# Altium PCB BLDC_Motor_Reversal_Rev1.PcbDoc
Units mil, origin at the board's own origin, x right, y up, seen from the top; angles counter-clockwise.
Board outline 3340 x 3040 mil, 2 copper layers (Top Layer, Bottom Layer); 10 components, 8 nets, 28 pads, 1 vias.
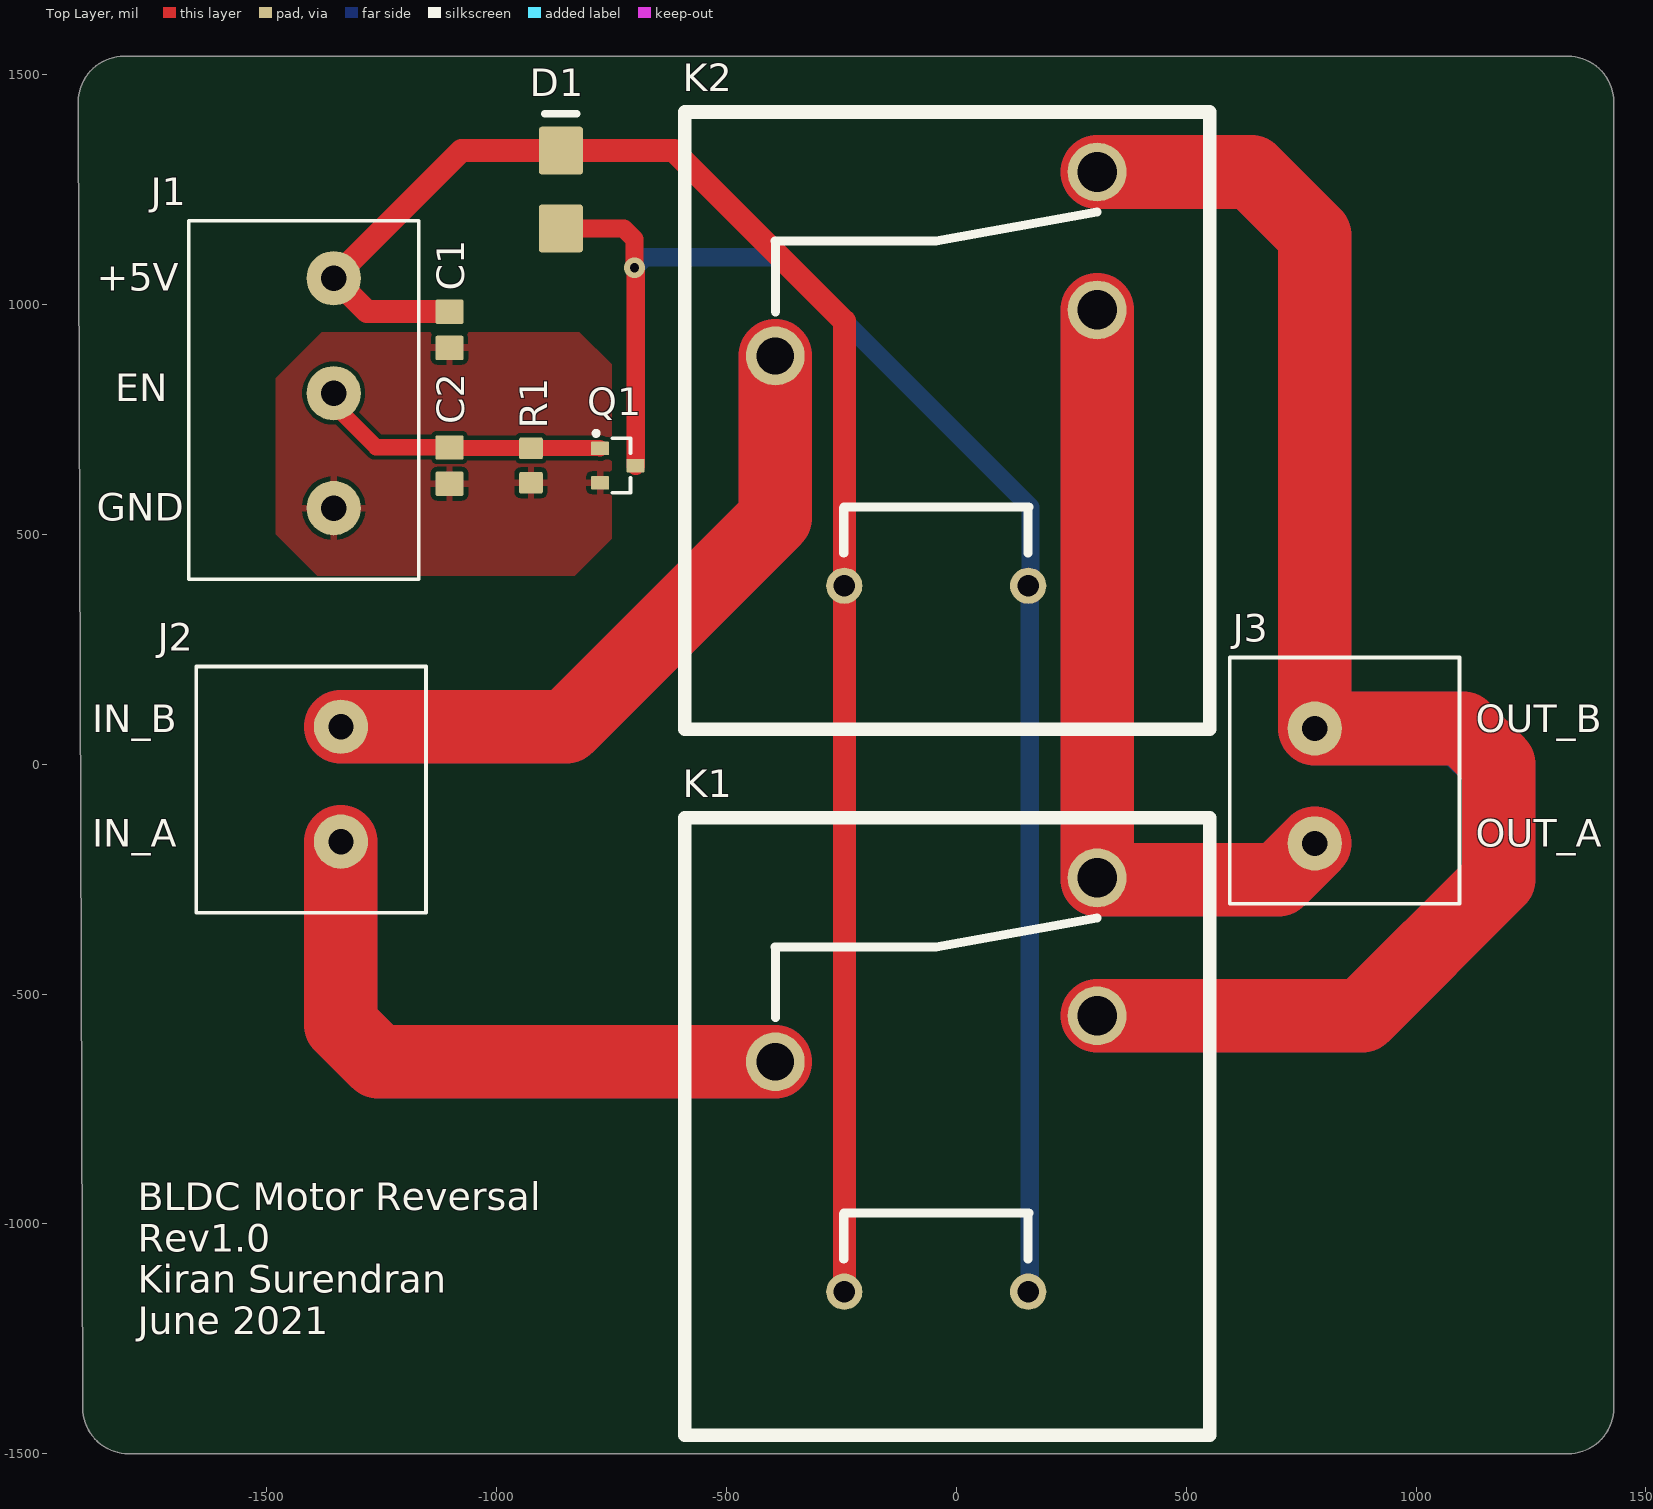
[diagram p0: Top Layer view]
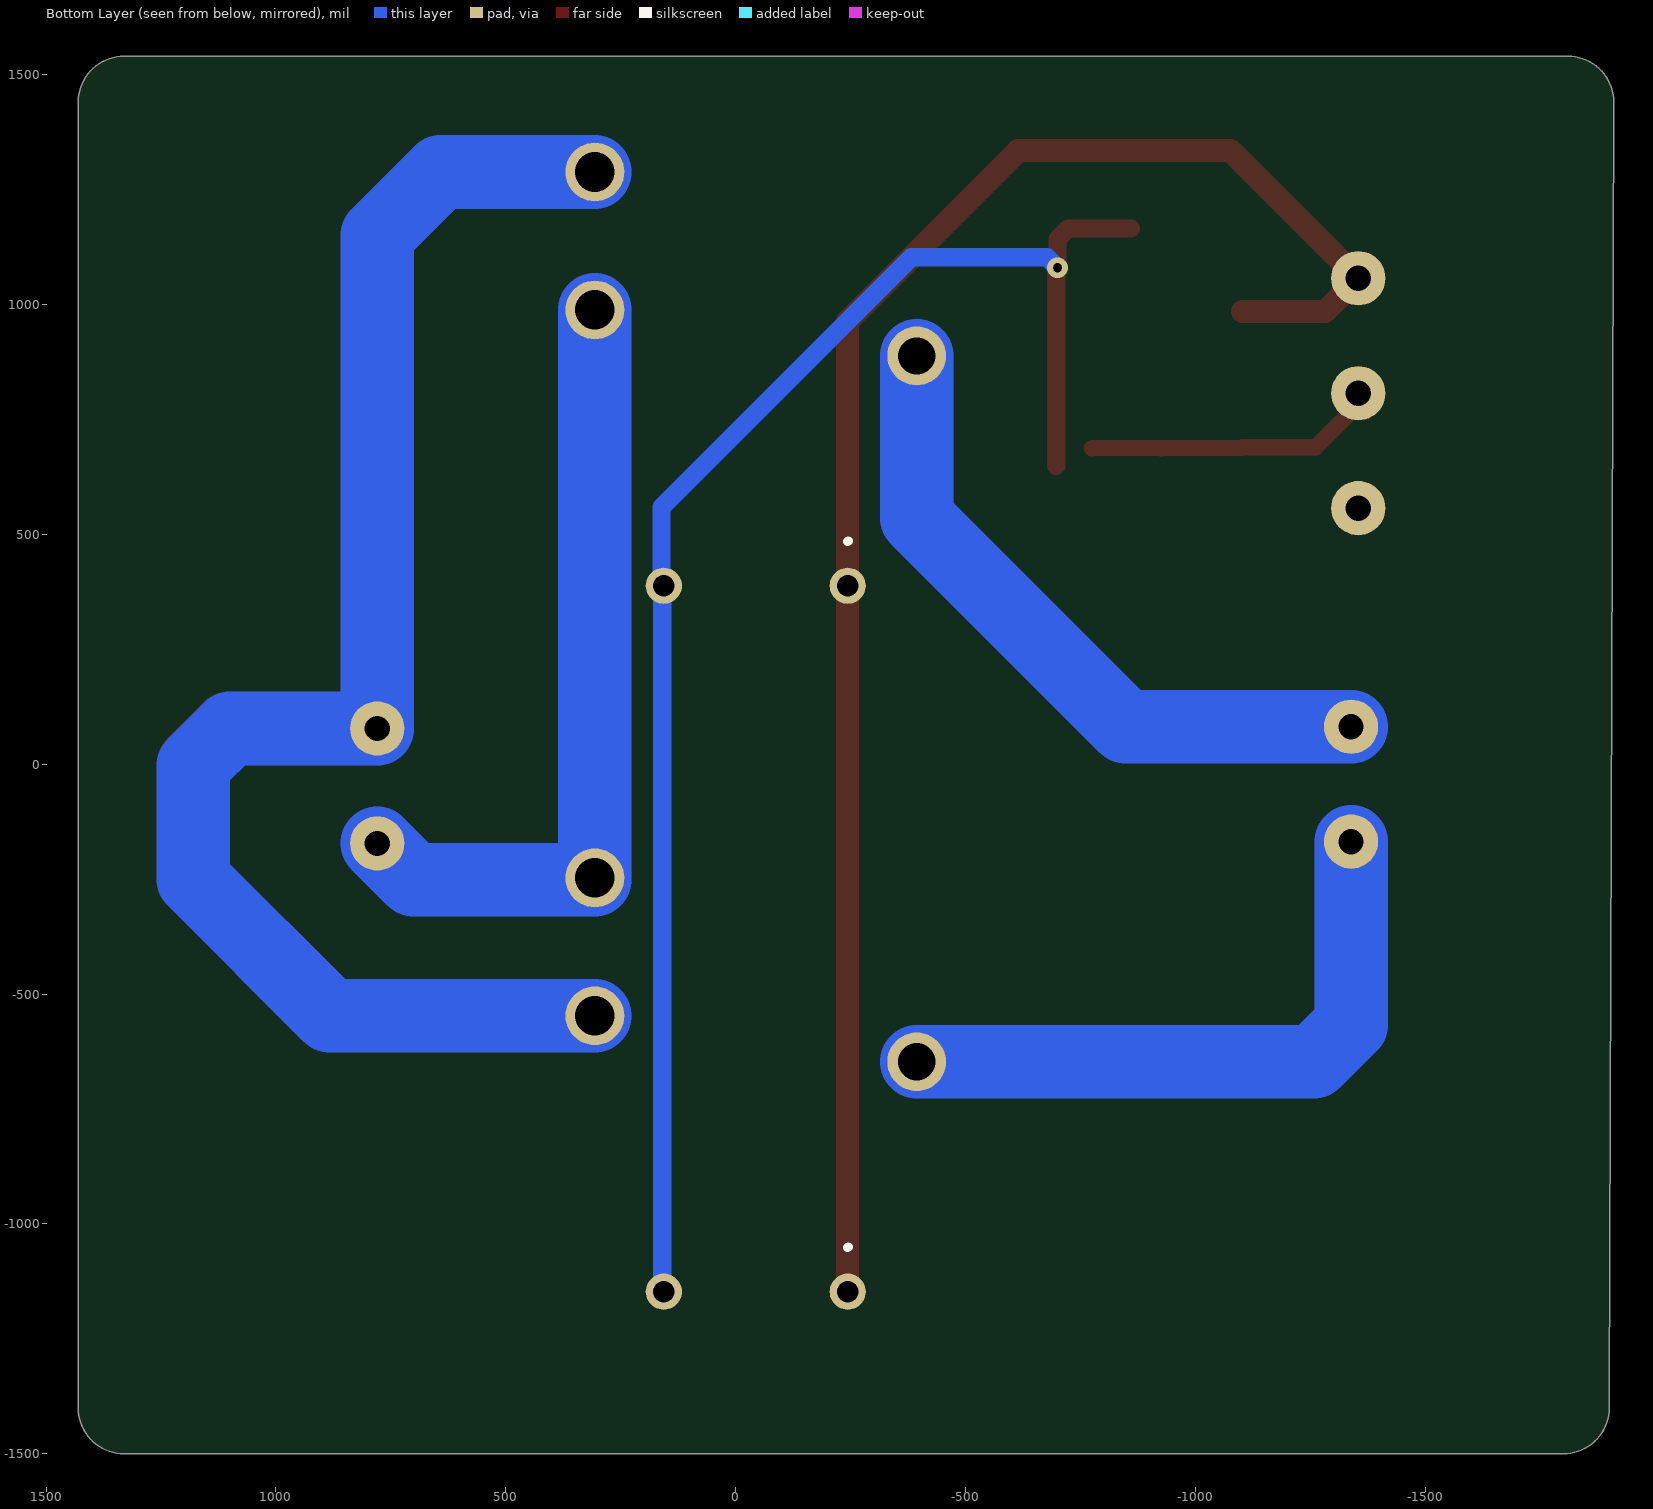
[diagram p1: Bottom Layer view, seen from below]
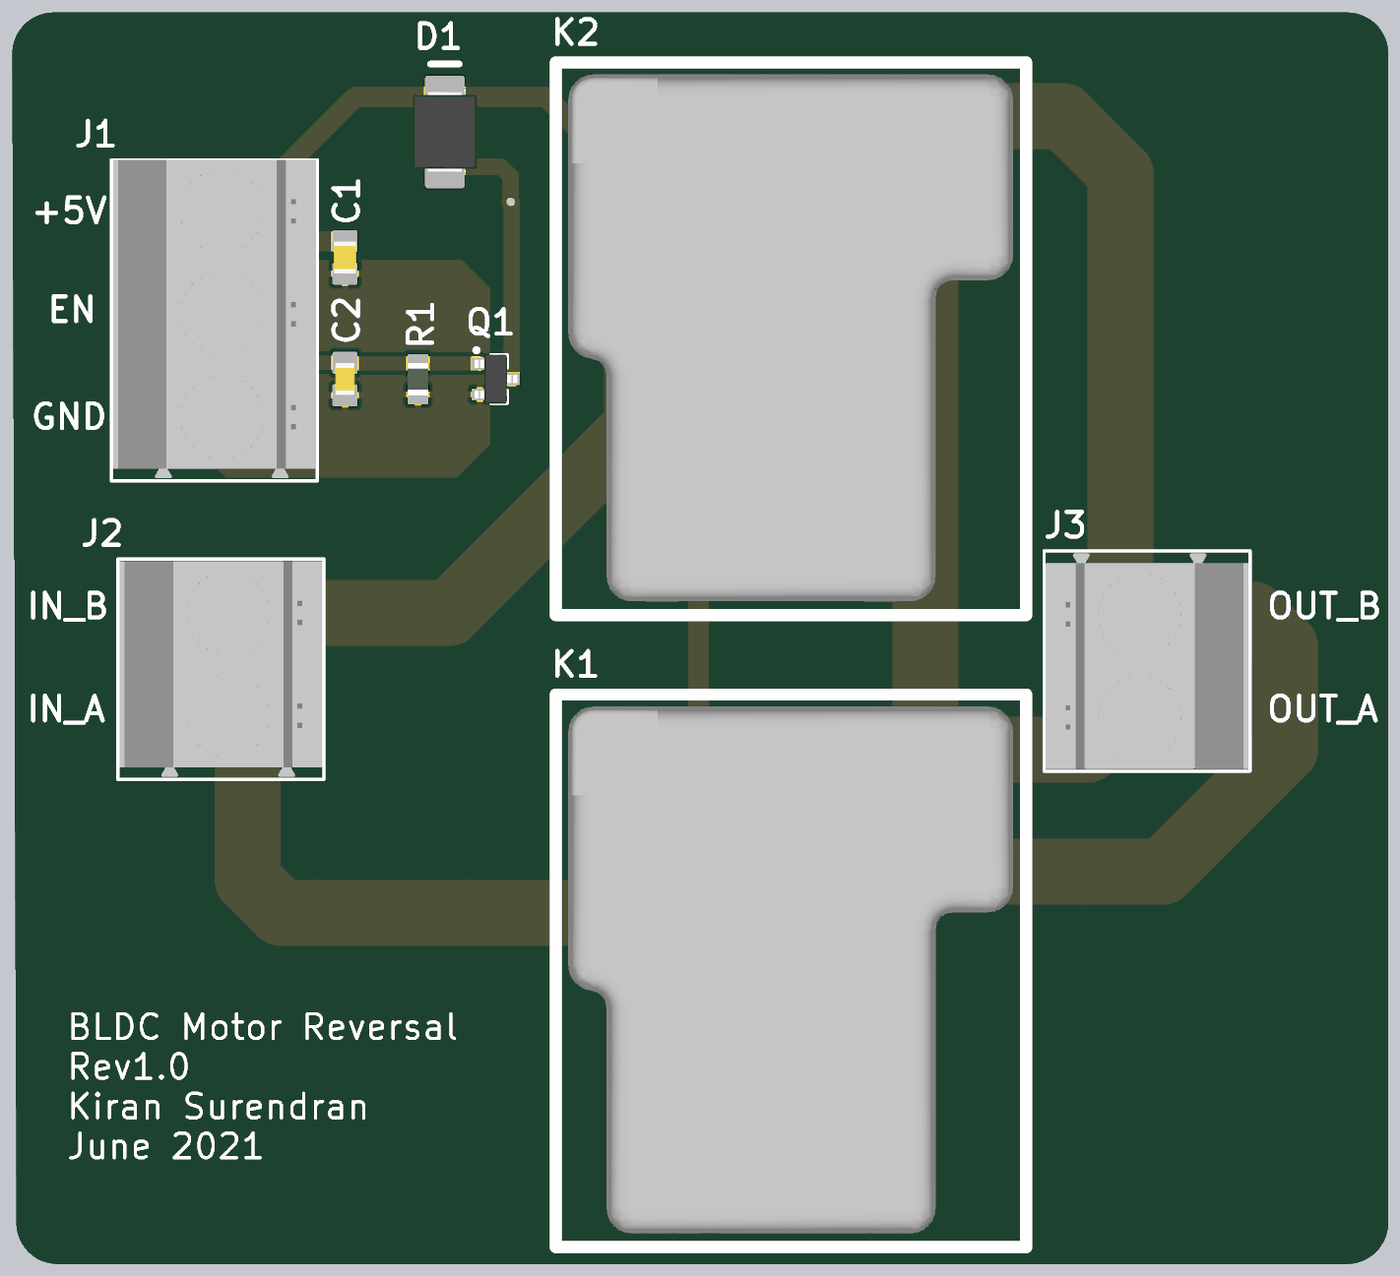
[diagram p2: 3D render of the assembled board from above, using the file's embedded part models]

## Layer stack, top to bottom
Top Solder: solder mask 0.4, Solder Resist, Dk 3.5
Top Layer: signal copper 1.4
Dielectric 1: dielectric 12.6, FR-4, Dk 4.8
Bottom Layer: signal copper 1.4
Bottom Solder: solder mask 0.4, Solder Resist, Dk 3.5

## Board outline
-1910,1420 -1910,1440 cw(c-1810,1440) -1810,1540 1330,1540 cw(c1330,1440) 1430,1440 1430,-1400 cw(c1330,-1400) 1330,-1500 -1800,-1500 cw(c-1800,-1400) -1900,-1400 -1900,-1380

## Design rules (kind name [scope] priority, off if disabled: settings)
BoardOutlineClearance [All] p1: gap=7.87 ignorepadtopadclearanceinfootprint=FALSE
Clearance "Polygon To Others" [InPolygon] p1: gap=10 ignorepadtopadclearanceinfootprint=FALSE
Clearance [All] p2: gap=5 ignorepadtopadclearanceinfootprint=FALSE except(9.84: Arc-Hole Track-Hole SMDPad-Hole THPad-Hole Via-Hole Fill-Hole Poly-Hole Region-Hole Text-Hole)
ComponentClearance [All] p1: gap=5 collisioncheckmode=3 verticalgap=5 showdistances=TRUE
DiffPairsRouting [All] p1: maxlimit=10 minlimit=5 mostfreqgap=5 toplayer_minwidth=5 toplayer_maxwidth=1000 toplayer_prefwidth=5 bottomlayer_minwidth=5 bottomlayer_maxwidth=1000 bottomlayer_prefwidth=5 maxuncoupledlength=500
Height [All] p1: minheight=0 maxheight=71497.94 prefheight=500
HoleSize [All] p1: absolutevalues=TRUE maxlimit=248.03 minlimit=11.81 maxpercent=80.000 minpercent=20.000
HoleToHoleClearance [All] p1: gap=9.84 allowstackedmicrovias=FALSE
MinimumAnnularRing [All] p1: minimumring=3
MinimumSolderMaskSliver [All] p1: minsoldermaskwidth=0
PlaneClearance [All] p1: clearance=8
PlaneConnect PlaneConnectPowerPads [InPadClass('PowerPads')] p1: planeconnectstyle=Direct reliefexpansion=20 reliefentries=4 reliefconductorwidth=10 reliefairgap=10
PlaneConnect [All] p2: pad.planeconnectstyle=Relief pad.reliefexpansion=11.81 pad.reliefentries=4 pad.reliefconductorwidth=8 pad.reliefairgap=8 via.planeconnectstyle=Direct via.reliefexpansion=11.81 via.reliefentries=4 via.reliefconductorwidth=5 via.reliefairgap=5
PolygonConnect PolygonConnectPowerPads [All vs (InPadClass('PowerPads'))] p1: connectstyle=Direct reliefconductorwidth=10 reliefentries=4 polygonreliefangle="90 Angle" airgapwidth=10
PolygonConnect [All] p2: thpad.connectstyle=Relief thpad.reliefconductorwidth=15 thpad.reliefentries=4 thpad.polygonreliefangle="90 Angle" thpad.airgapwidth=10 smdpad.connectstyle=Relief smdpad.reliefconductorwidth=15 smdpad.reliefentries=4 smdpad.polygonreliefangle="90 Angle" smdpad.airgapwidth=10 via.connectstyle=Direct via.reliefconductorwidth=5 via.reliefentries=4 via.polygonreliefangle="90 Angle" via.airgapwidth=5
RoutingVias [All] p1: holewidth=11.81 width=23.62 viastyle="Through Hole" minholewidth=11.81 minwidth=23.62 maxholewidth=23.62 maxwidth=259.84
SilkToSilkClearance [All] p1: silktosilkclearance=0
SilkToSolderMaskClearance [IsPad] p1: minsilkscreentomaskgap=5 clearancetoexposedcopper=TRUE
SolderMaskExpansion [All] p1: expansion=2.95 istentingtop=FALSE
Width [All] p1: maxlimit=1000 minlimit=5 preferedwidth=5 minimp=50.000000 maximp=50.000000 favimp=50.000000
20 further rules are at their usual default settings.

## Components (designator, comment, footprint, x,y, rotation, side; value= is the part's Value field where it differs from the comment)
C1 "C0805C106K4PACTU" C0805C106K4PACTU -1102.36,944.88 r90 top
C2 "C0805C104K5RACTU" C0805C104K5RACTU -1102.36,649.61 r90 top
D1 "S1GB-13-F" S1GB-13-F -860,1250 r90 top
J1 "796740-3" 796740-3 -1354.33,807.09 r90 top
J2 "796740-2" 796740-2 -1338.58,-43.31 r90 top
J3 "796740-2" 796740-2 779.53,-47.24 r270 top
K1 "T9AS5D12-5" T9AS5D12-5 -393.7,-551.18 r0 top
K2 "T9AS5D12-5" T9AS5D12-5 -393.7,984.25 r0 top
Q1 "SI2312BDS-T1-E3" SI2312BDS-T1-E3 -736.22,649.61 r0 top
R1 "RC0805JR-0710KL" RC0805JR-0710KL -925.2,649.61 r90 top

## Footprints (in the part's own frame and the unit in brackets; to place one, negate y for a bottom-side part, rotate by r counter-clockwise, add the part's x,y. Pads: shape width x height; smd on the part's side, far side on the other; paste and mask are expansions set on the pad)
796740-2 [mm]
  round 3 hole 1.4: 1(-3.175,0) 2(3.175,0)
  silkscreen extent -7.1,-4.7 6.5,8, body extent -6.95,-4.6 6.35,7.9, height 21.51
796740-3 [mm]
  round 3 hole 1.4 mask+0.102: 1(-6.35,0) 2(0,0) 3(6.35,0)
  silkscreen extent -10.28,-4.7 9.53,8, body extent -10.12,-4.6 9.53,7.9, height 21.51
C0805C104K5RACTU [mm]
  rrect15% 1.35x1.55 smd: 1(-1,0) 2(1,0)
  body extent -1,-0.6 1,0.6, height 0.89
C0805C106K4PACTU [mm]
  rrect15% 1.35x1.55 smd: 1(-1,0) 2(1,0)
  body extent -1,-0.7 1,0.7, height 1.21
RC0805JR-0710KL [mm]
  rrect15% 1.2x1.3 smd: 1(-0.95,0) 2(0.95,0)
  body extent -1,-0.62 1,0.62, height 0.61
S1GB-13-F [mm]
  rrect15% 2.65x2.45 smd: 1(2.15,0) 2(-2.15,0)
  silkscreen extent 4.19,-0.89 4.19,0.89, body extent -2.5,-1.97 2.5,1.97, height 2.5
SI2312BDS-T1-E3 [mm]
  rrect15% 1x0.75 smd: 1(-0.984,0.95) 2(-0.984,-0.95) 3(0.984,0)
  silkscreen extent -1.32,-1.5 0.7,1.9, body extent -1.32,-1.52 1.32,1.52, height 1.12
T9AS5D12-5 [mm]
  round 3.25 hole 2.19: 1(17.78,7.72) 2(17.78,0.1)
  round 3.25 hole 2.06: 3(0,-2.44)
  round 2 hole 1.17: 4(3.81,-15.14) 5(13.97,-15.14)
  silkscreen extent -5,-23.06 24,11.03, body extent -4.23,-22.22 23.2,10.3, height 20.05

## Part data
C1: "CERAMIC CAPACITOR, 10UF, 16V, X5R, 10%, 0805", Capacitance=10uF, Case/Package=0805, Manufacturer 1=KEMET, Supplier Part Number 1=399-8012-1-ND, Voltage Rating=16V, Manufacturer Part Number 1=C0805C106K4PACTU, Supplier 1=Digi-Key
C2: "Cap Ceramic 0.1uF 50V X7R 10% SMD 2.0 x 1.2 mm 125 C Paper T/R", Capacitance=100nF, Case/Package=0805, Manufacturer 1=KEMET, Supplier Part Number 1=399-1170-1-ND, Voltage Rating=50V, Manufacturer Part Number 1=C0805C104K5RACTU, Supplier 1=Digi-Key
D1: "Flyback Diode for SPDT", Manufacturer 1="Diodes Incorporated", Supplier Part Number 1=S1GB-FDICT-ND, IFSM=8.0A, Manufacturer Part Number 1=S1GB-13-F, Supplier 1=Digi-Key, VRRM=325V
J1: "TERM BLK 3P SIDE ENT 6.35MM PCB", Manufacturer 1="TE Connectivity AMP Connectors", Supplier Part Number 1=A98276-ND, Manufacturer Part Number 1=796740-3, Supplier 1=Digi-Key
J2 J3: "TERMINAL BLOCK, PLUG, 2POS, 24-10AWG", Current Rating=30A, Manufacturer="TE Connectivity", Supplier Part Number 1=A98275-ND, Voltage Rating=300V, Manufacturer Part Number=796740-2, Supplier 1=Digi-Key
K1 K2: "RELAY GEN PURPOSE SPDT 20A 5V", Coil Current=200mA, Coil Voltage (DC)=5V, Contact Current Rating=20A, Contact Voltage Rating (AC)=277V, Current Rating=30A, Manufacturer 1="TE Connectivity Potter & Brumfield Relays", Supplier Part Number 1=T9AS5D12-5-ND, Manufacturer Part Number 1=T9AS5D12-5, Supplier 1=Digi-Key, Voltage Rating (DC)=5V
Q1: "MOSFET", Manufacturer 1="Vishay Siliconix", Supplier Part Number 1=SI2312BDS-T1-E3CT-ND, Manufacturer Part Number 1=SI2312BDS-T1-E3, Supplier 1=Digi-Key
R1: "Res Thick Film 0805 10K Ohm 5% 1/8W ±100ppm/°C Molded SMD Paper T/R", Manufacturer 1=Yageo, Package=0805, Resistance=10kR, Supplier Part Number 1=311-10KARCT-ND, Tolerance=5%, Manufacturer Part Number 1=RC0805JR-0710KL, Supplier 1=Digi-Key

## Via types
v1: diameter 45, hole 20, Top Layer to Bottom Layer, tented both sides, 1 vias

## Nets (pads, with @x,y where several pads share a name; then routed paths per layer and width w, separated by ;. In a path a pad name is that pad's centre, name@x,y a point inside that pad or via, vN(x,y) a via of type N, cw(c..) or ccw(c..) an arc to the next point about the centre after c; other vN are vias at no path point)
5V: C1.2 D1.1 J1.3 K1.4 K2.4 | length 3772.3
  Top Layer w50: C1.2 -1281.5,984.25 J1.3 -1076.77,1334.65 -930,1334.65 -614.65,1334.65 -243.7,963.7 K2.4 K1.4
ENABLE_REVERSE: C2.2 J1.2 Q1.1 R1.2 | length 644.4
  Top Layer w35: J1.2 -1354.33,781.79 -1262.1,689.56 -1102.95,689.56 -1100.98,687.59 -925.78,687.59 R1.2 -924.61,687.59 -775.57,687.59 Q1.1
GND: C1.1 C2.1 J1.1 Q1.2 R1.1
IN_PHASE_A: J2.1 K1.3 | length 2753.1
  Top Layer w160: J2.1 -1338.58,-566.53 -1257.86,-647.24 K1.3
  Bottom Layer w160: J2.1 -1338.58,-566.53 -1257.86,-647.24 K1.3
IN_PHASE_B: J2.2 K2.3 | length 2970.2
  Top Layer w160: J2.2 -848.31,81.69 -393.7,536.3 K2.3
  Bottom Layer w160: J2.2 -848.31,81.69 -393.7,536.3 K2.3
OUT_PHASE_A: J3.2 K1.1 K2.2 | length 3482.7
  Top Layer w160: K1.1@306.3,-251.18 700.59,-251.18 J3.2 ; K1.1 K2.2
  Bottom Layer w160: K1.1@306.3,-251.18 700.59,-251.18 J3.2 ; K1.1 K2.2
OUT_PHASE_B: J3.1 K1.2 K2.1 | length 6564
  Top Layer w160: K1.2 882.76,-547.24 1180,-250 1180,0 1102.24,77.76 J3.1 780,78.23 780,1150 641.81,1288.19 K2.1
  Bottom Layer w160: K1.2 882.76,-547.24 1180,-250 1180,-2.96 1099.28,77.76 J3.1 780,78.23 780,1150 641.81,1288.19 K2.1
PHASE_CONTROL_FET: D1.2 K1.5 K2.5 Q1.3 | length 3465.2
  Top Layer w40: D1.2 -723.43,1165.35 -700,1141.92 v1(-700,1080) -697.46,1077.46 Q1.3
  Bottom Layer w40: v1(-700,1080) -677.64,1102.36 -381.89,1102.36 161.42,559.06 161.42,396.06 163.78,393.7 160.04,389.96 160.04,-1139.57 K1.5@156.3,-1143.31

## Polygon pours and split planes (outlines as drawn)
GND on Top Layer "GND_L01_P000" (solid, remove dead copper, pour order 0): -1480,840 -1380,940 -820,940 -750,870 -750,490 -830,410 -1390,410 -1480,500

## Silkscreen, mask and mechanical layers (free items; w line width, h text height)
Top Overlay:
  text "+5V" at -1870,1030 h60
  text "EN" at -1830,790 h60
  text "GND" at -1870,530 h60
  text "IN_B" at -1880,70 h60
  text "OUT_B" at 1130,70 h60
  text "IN_A" at -1880,-180 h60
  text "OUT_A" at 1130,-180 h60
  text "BLDC Motor Reversal / Rev1.0 / Kiran Surendran / June 2021" at -1780,-1240 h60